# Altium PCB ESP32-S3-PCB.PcbDoc
Units mm, origin at the board's own origin, x right, y up, seen from the top; angles counter-clockwise.
Board outline 32.71 x 66 mm, 4 copper layers (Top Layer, Power, Ground, Bottom Layer), stack 0.603 mm thick; 45 components, 55 nets, 231 pads, 89 vias.
Unrouted connection lines stored in the file: 7.
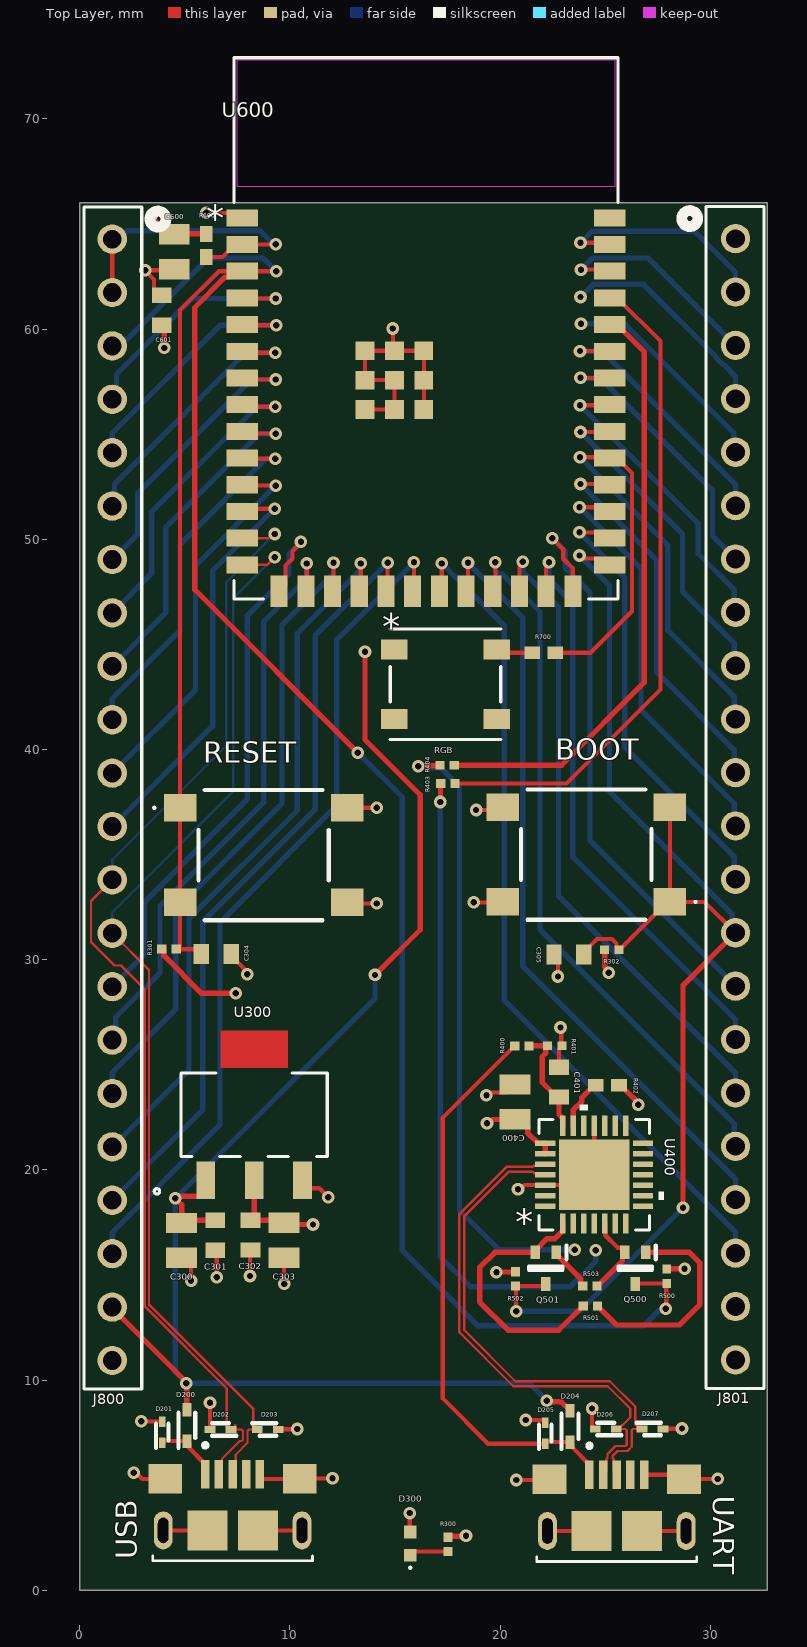
[diagram p0: Top Layer view]
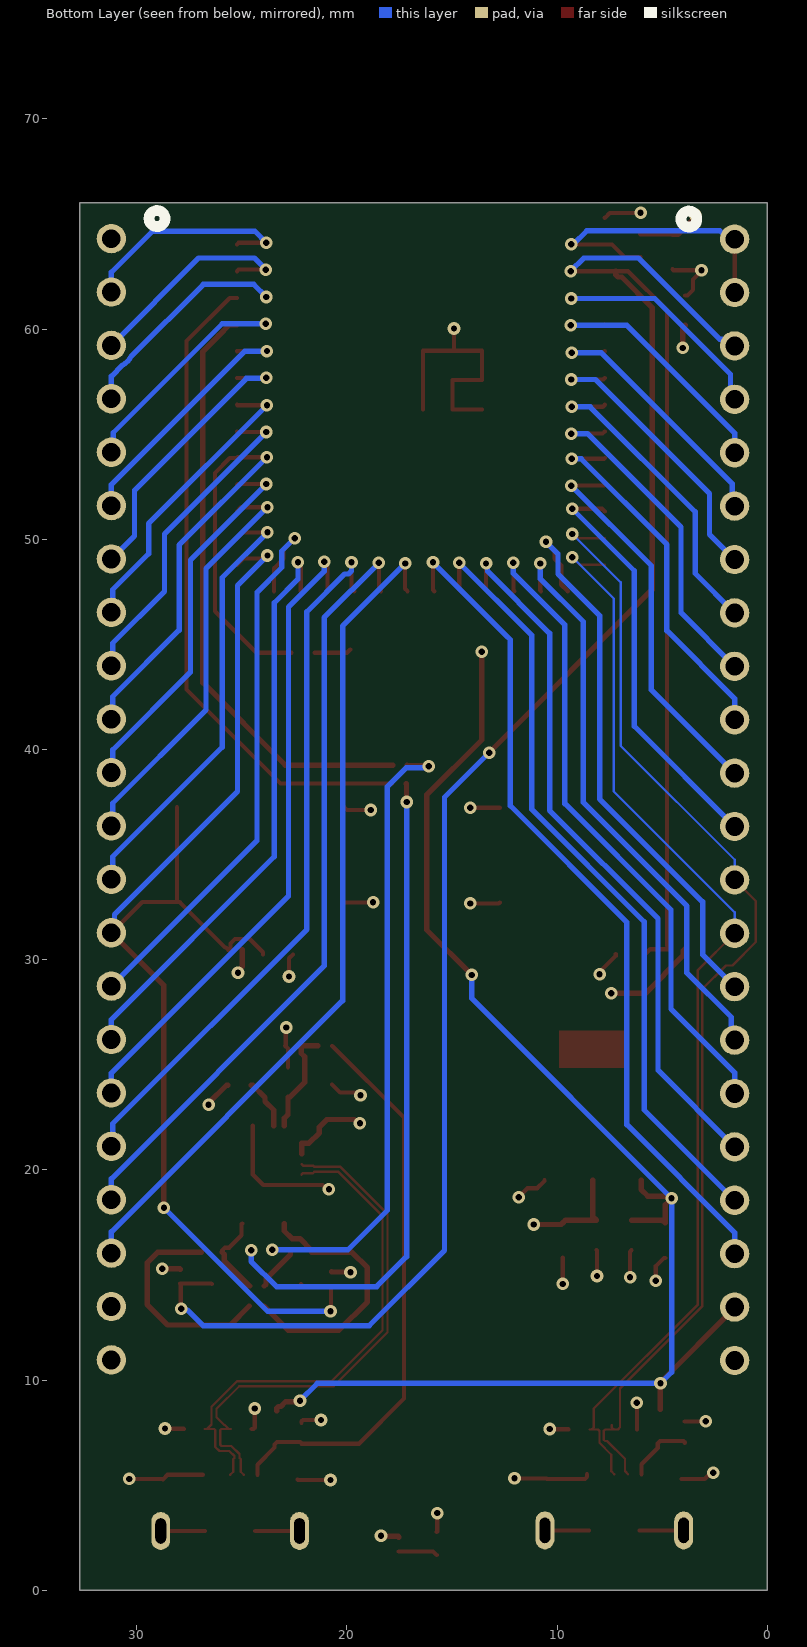
[diagram p1: Bottom Layer view, seen from below]
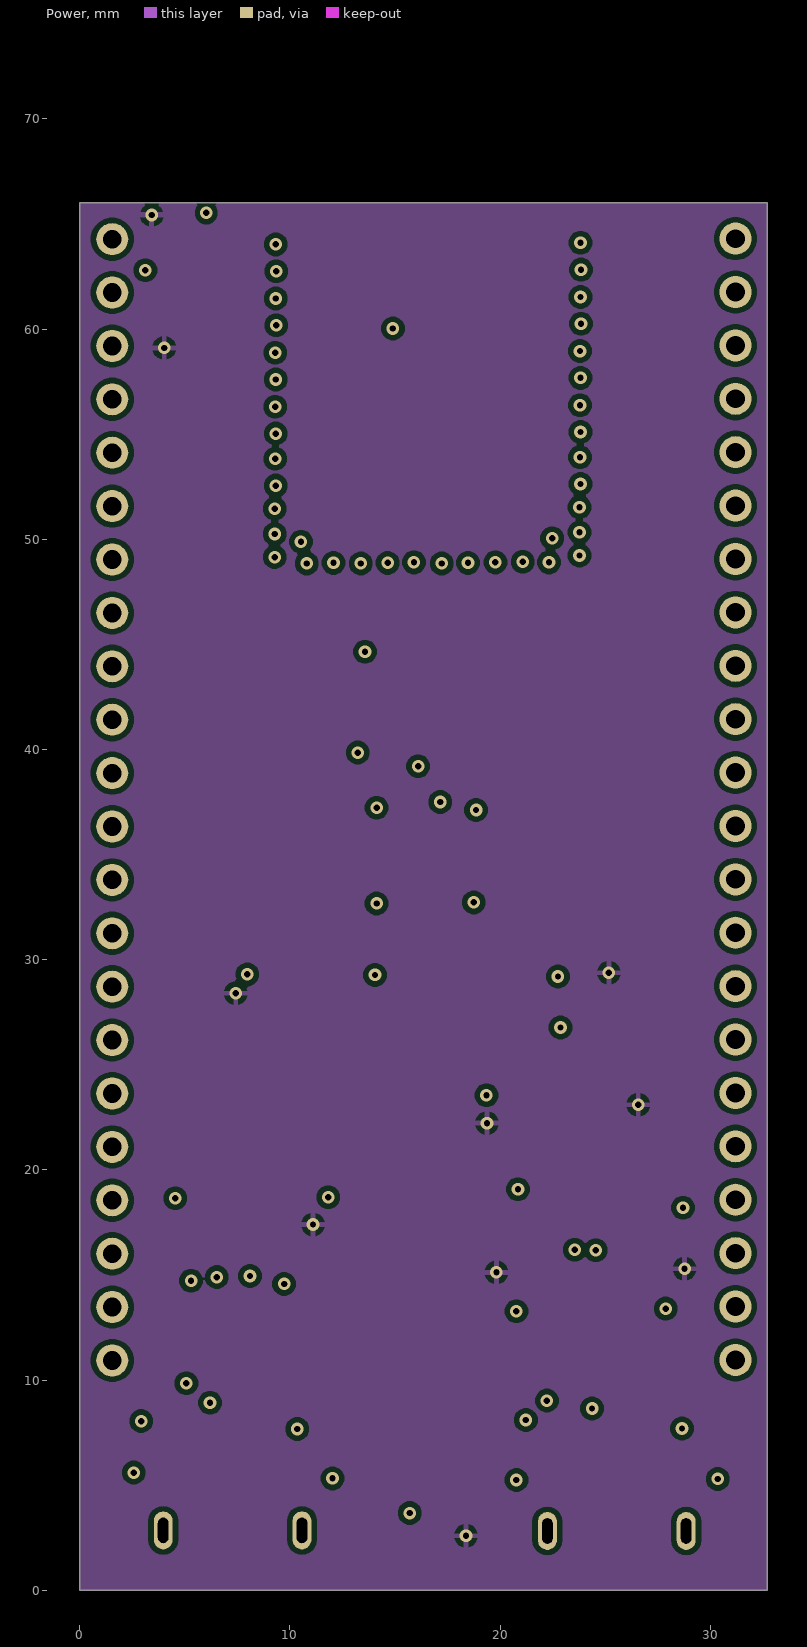
[diagram p2: Power]
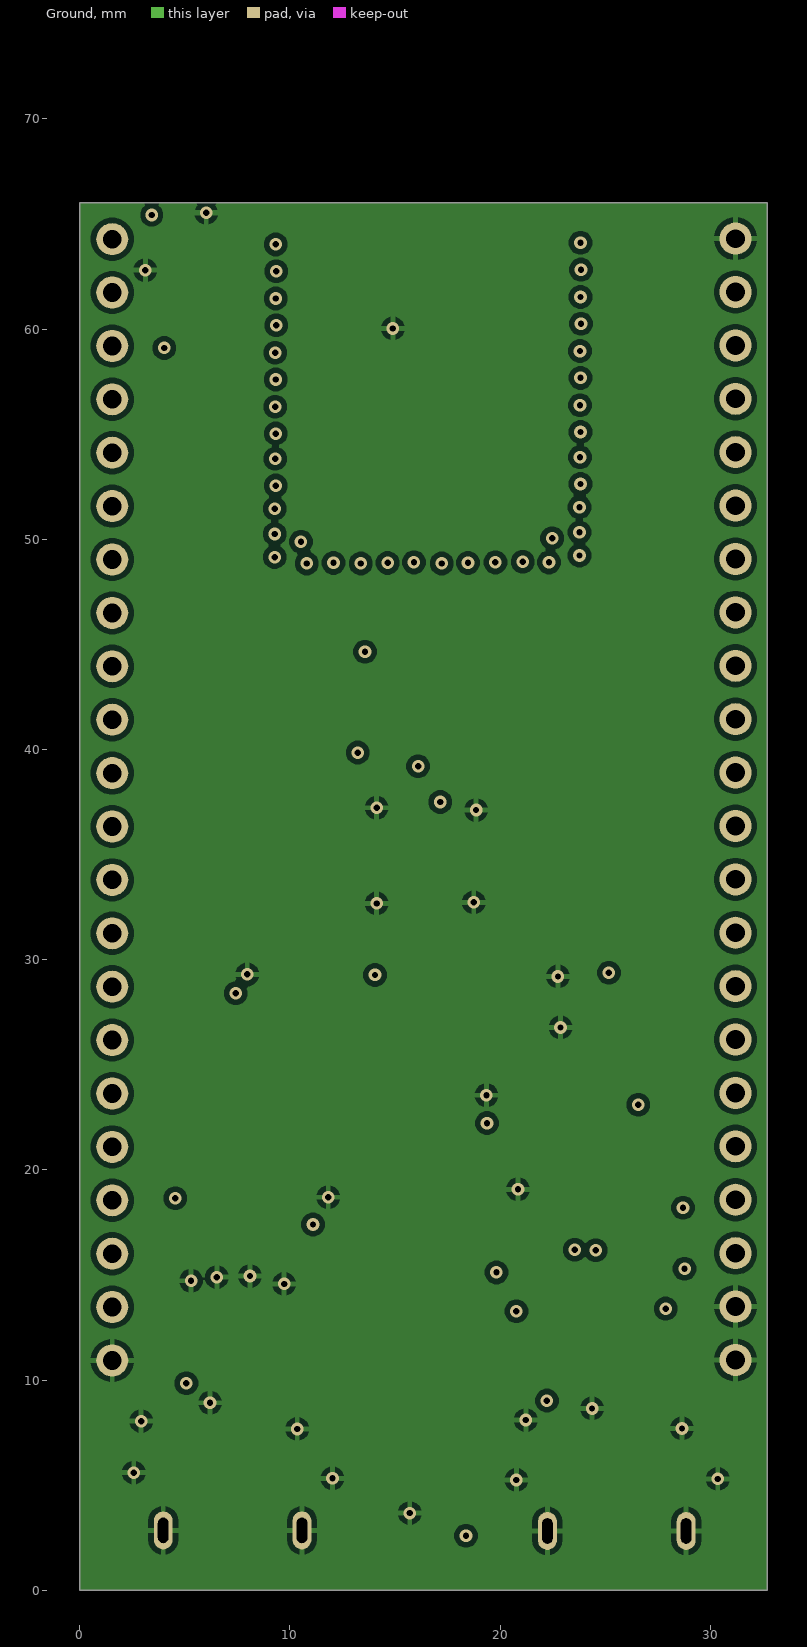
[diagram p3: Ground]
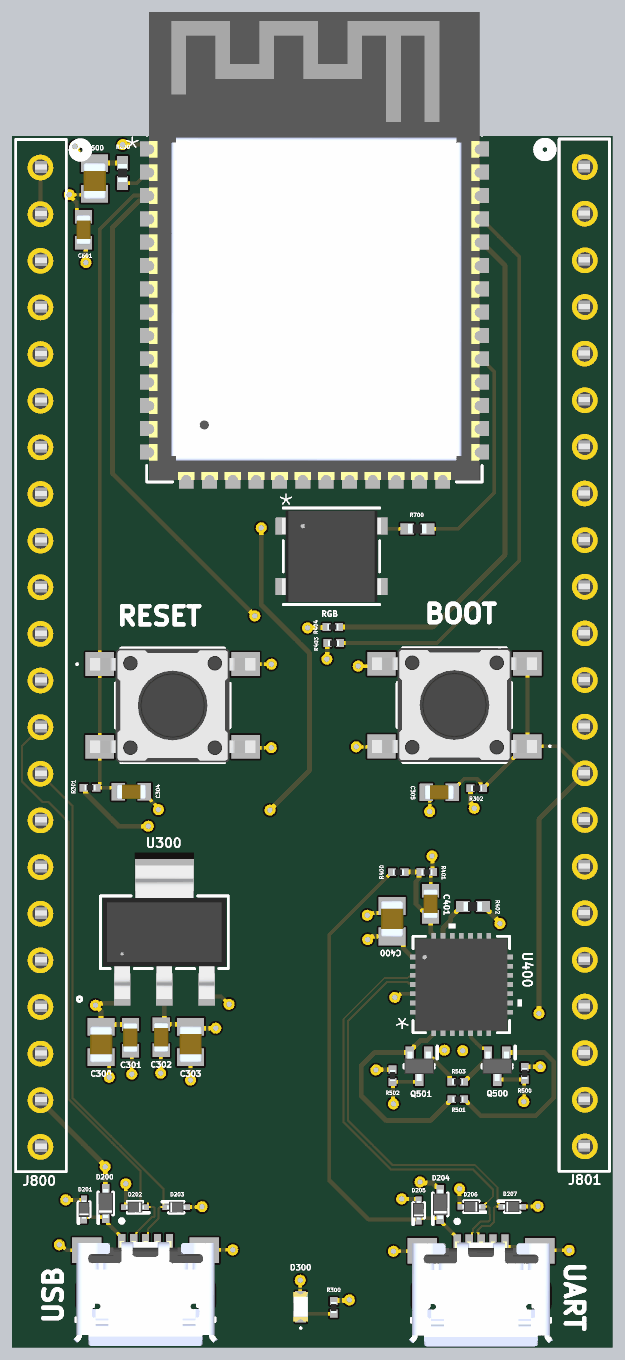
[diagram p4: 3D render of the assembled board from above, using the file's embedded part models]

## Layer stack, top to bottom
Top Solder: solder mask 0.0102, Solder Resist, Dk 3.5
Top Layer: signal copper 0.0356
Dielectric 2: prepreg 0.0711, PP-006, Dk 4.1
Power: signal copper 0.035
Dielectric 1: dielectric 0.32, FR-4, Dk 4.8
Ground: signal copper 0.035
Dielectric 3: prepreg 0.0711, PP-006, Dk 4.1
Bottom Layer: signal copper 0.0356
Bottom Solder: solder mask 0.0102, Solder Resist, Dk 3.5

## Board outline
0,0 0,66 32.707,66 32.707,0

## Design rules (kind name [scope] priority, off if disabled: settings)
Clearance [All] p1: gap=0.254 ignorepadtopadclearanceinfootprint=FALSE except(0.1: Arc-Arc Arc-Track Track-Track SMDPad-SMDPad; 0.2: Arc-SMDPad Track-SMDPad)
DiffPairsRouting USB_UART [InDifferentialPairClass('USB_UART_DIFF')] p1: maxlimit=0.127 minlimit=0.127 mostfreqgap=0.127 toplayer_minwidth=0.11 toplayer_maxwidth=0.11 toplayer_prefwidth=0.11 midlayer1_minwidth=0.057 midlayer1_maxwidth=0.057 midlayer1_prefwidth=0.057 midlayer2_minwidth=0.057 midlayer2_maxwidth=0.057 midlayer2_prefwidth=0.057 bottomlayer_minwidth=0.11 bottomlayer_maxwidth=0.11 bottomlayer_prefwidth=0.11 impedanceprofiledriven=TRUE impedanceprofileid={631D760A-93E1-46DE-AC06-2FC455241921} impedanceprofilevalue=90.000000 maxuncoupledlength=12.7
PolygonConnect [All] p1: connectstyle=Relief reliefconductorwidth=0.254 reliefentries=4 polygonreliefangle="90 Angle" airgapwidth=0.254
RoutingVias [All] p1: holewidth=0.711 width=1.27 viastyle="Through Hole" minholewidth=0.711 minwidth=1.27 maxholewidth=0.711 maxwidth=1.27
SolderMaskExpansion [All] p1: expansion=0.102 istentingtop=FALSE
SupplyNets "Schematic Supply Nets_5" [InNet('ESP_3V3')] p1: voltage=0.000
SupplyNets "Schematic Supply Nets_4" [InNet('VBBUS')] p2: voltage=0.000
SupplyNets "Schematic Supply Nets_3" [InNet('GND')] p3: voltage=0.000
SupplyNets "Schematic Supply Nets_2" [InNet('VCC_3V3')] p4: voltage=0.000
SupplyNets "Schematic Supply Nets_1" [InNet('VCC_5V')] p5: voltage=0.000
SupplyNets "Schematic Supply Nets" [InNet('VBUS')] p6: voltage=0.000
Width VCC_5V [InNet('VCC_5V')] p1: maxlimit=0.254 minlimit=0.254 preferedwidth=0.254
Width [All] p2: maxlimit=0.254 minlimit=0.2 preferedwidth=0.254 midlayer1_minwidth=0.254 midlayer2_minwidth=0.254 bottomlayer_minwidth=0.254 minimp=50.000000 maximp=50.000000 favimp=50.000000
29 further rules are at their usual default settings.

## Classes and differential pairs
differential pair class USB_UART_DIFF: USB_UART
component class USB: D200 D201 D202 D203 D204 D205 D206 D207 UART USB
component class USB_TO_UART_CONVERTER: C400 C401 R400 R401 R402 U400
component class RGB_LED: R700 RGB
component class POWER: BOOT C300 C301 C302 C303 C304 C305 D300 R300 R301 R302 RESET U300
component class PIN-HEADERS: J800 J801
component class ESP32-S3-WROOM-1U: C600 C601 R600 U600
component class AUTO_PROGRAMMING: Q500 Q501 R500 R501 R502 R503
differential pair USB: +GPIO20 -GPIO19
differential pair USB_UART: +USB_UART_P -USB_UART_N

## Components (designator, comment, footprint, x,y, rotation, side; value= is the part's Value field where it differs from the comment)
BOOT "222AMVBAR" 222AMVBAR 24.1,35 r180 top
C300 "10 µF ±10% 25V" CAPC2012X145N 4.85,16.645 r90 top value="10 µF"
C301 "0.1 µF ±10% 50V" CAPC1608X90N 6.45,16.89 r90 top value="0 .1 µF"
C302 "0.1 µF ±10% 50V" CAPC1608X90N 8.125,16.9 r90 top value="0 .1 µF"
C303 "10 µF ±10% 25V" CAPC2012X145N 9.725,16.65 r90 top value="10 µF"
C304 "0.1 µF ±10% 50V" CAPC1608X90N 6.5,30.275 r180 top value="0 .1 µF"
C305 "0.1 µF ±10% 50V" CAPC1608X90N 23.275,30.25 r0 top value="0 .1 µF"
C400 "10 µF ±10% 25V" CAPC2012X145N 20.7,23.23 r270 top value="10 µF"
C401 "1 µF ±10% 10V" CAPC1608X90N 22.8,24.175 r270 top value="1 µF"
C600 "10 µF ±10% 25V" CAPC2012X145N 4.5,63.675 r90 top value="10 µF"
C601 "0.1 µF ±10% 50V" CAPC1608X90N 3.9,60.89 r270 top value="0 .1 µF"
D200 "370 mV @ 1 mA" SODFL1608X70N 5.1,7.85 r90 top
D201 "12.5V Clamp" SODFL1006X40N 3.925,7.525 r90 top
D202 "12.5V Clamp" SODFL1006X40N 6.7,7.65 r180 top
D203 "12.5V Clamp" SODFL1006X40N 8.95,7.65 r0 top
D204 "370 mV @ 1 mA" SODFL1608X70N 23.325,7.8 r90 top
D205 "12.5V Clamp" SODFL1006X40N 22.15,7.475 r90 top
D206 "12.5V Clamp" SODFL1006X40N 25.025,7.675 r180 top
D207 "12.5V Clamp" SODFL1006X40N 27.25,7.675 r0 top
D300 "LED RED" 5988A10107F 15.725,2.225 r90 top
J800 "CONN HEADER VERT 22POS" CON22_1X22_TU_TSW 1.55,37.605 r270 top locked
J801 "CONN HEADER VERT 22POS" CON22_1X22_TU_TSW 31.2,37.63 r270 top locked
Q500 "NSS20101JT1G" SOTFL50P160X80-3N 26.425,15.325 r270 top
Q501 "NSS20101JT1G" SOTFL50P160X80-3N 22.175,15.325 r270 top
R300 "3.4K OHM 1%" RESC0603X26N 17.525,2.19 r270 top value="3.4 kOhms"
R301 "10K OHM 1%" RESC0603X26N 4.25,30.5 r180 top value="10 kOhms"
R302 "10K OHM 1%" RESC0603X26N 25.31,30.475 r180 top value="10 kOhms"
R400 "22.1K OHM 1%" RESC0603X26N 21.04,25.9 r0 top value="22.1 kOhms"
R401 "47.5K OHM 1%" RESC0603X26N 22.6,25.905 r180 top value="47.5 kOhms"
R402 "1K Ohm 5%" RESC1005X40N 25.1,24.025 r0 top value="1K OHM"
R403 "0 OHM 1%" RESC0603X26N 17.515,38.375 r0 top value="10 kOhms"
R404 "0 OHM 1%" RESC0603X26N 17.475,39.25 r0 top value="10 kOhms"
R500 "10K OHM 1%" RESC0603X26N 27.925,14.94 r90 top value="10 kOhms"
R501 "10K OHM 1%" RESC0603X26N 24.29,13.525 r0 top value="10 kOhms"
R502 "10K OHM 1%" RESC0603X26N 20.725,14.815 r90 top value="10 kOhms"
R503 "10K OHM 1%" RESC0603X26N 24.275,14.475 r180 top value="10 kOhms"
R600 "1K Ohm 5%" RESC1005X40N 6.025,63.975 r270 top value="1K OHM"
R700 "1K Ohm 5%" RESC1005X40N 22.075,44.6 r180 top value="1K OHM"
RESET "222AMVBAR" 222AMVBAR 8.75,34.975 r0 top locked
RGB "ADDRESS RGB LED" COM-16347_SPK 17.4,43.1 r0 top (schematic designator LED700)
U300 "IC REG LINEAR 3.3V 1A" KC_3_ADI 8.3,22.625 r0 top
U400 "IC USB TO UART BRIDGE" QFN28_5X5_SIL 24.475,19.775 r0 top
U600 "ESP32-S3-WROOM-1-N8" ESP32-S3-WROOM-1_EXP 16.475,60.03 r0 top locked
UART "MICRO USB B" AMPHENOL_10118193-0001LF 25.55,2.825 r0 top locked
USB "MICRO USB B" AMPHENOL_10118193-0001LF 7.275,2.85 r0 top

## Footprints (in the part's own frame and the unit in brackets; to place one, negate y for a bottom-side part, rotate by r counter-clockwise, add the part's x,y. Pads: shape width x height; smd on the part's side, far side on the other; paste and mask are expansions set on the pad)
222AMVBAR [mm]
  rect 1.55x1.3 smd: 1(-3.975,2.25) 2(-3.975,-2.25) 3(3.975,2.25) 4(3.975,-2.25)
  silkscreen extent -5.25,-3.1 3.1,3.1, body extent -4.5,-3.1 4.5,3.1, height 5
5988A10107F [mm]
  rect 0.6x0.6 smd: 1(-0.55,0) 2(0.55,0)
  silkscreen extent -1.2,-0.05 -1.1,0.05, body extent -0.8,-0.4 0.8,0.4, height 0.7
AMPHENOL_10118193-0001LF [mm]
  rect 0.4x1.35 smd: 1(-1.3,2.675) 2(-0.65,2.675) 3(0,2.675) 4(0.65,2.675) 5(1.3,2.675)
  rect 1.6x1.4 smd: S1(-3.2,2.45) S2(3.2,2.45)
  rect 1.9x1.9 smd: S3(1.2,0) S4(-1.2,0)
  oval 0.9x1.8 hole 0.5 slot 1.2 at 90 deg: S5(-3.3,0) S6(3.3,0)
  silkscreen extent -3.8,-1.45 3.8,4.15, body extent -3.93,-2.76 3.93,2.95, height 2.85
CAPC1608X90N [mm]
  rect 0.73x0.94 smd: 1(-0.71,0) 2(0.71,0)
  body extent -0.8,-0.4 0.8,0.4, height 0.9
CAPC2012X145N [mm]
  rect 0.97x1.47 smd: 1(-0.83,0) 2(0.83,0)
  body extent -1.13,-0.63 0.87,0.63, height 1.45
COM-16347_SPK [mil]
  rect 49x37 smd paste+0 mask+0: 1(-96,64.96) 2(-96,-64.96) 3(96,-64.96) 4(96,64.96)
  silkscreen extent -104,-104 104,104, body extent -106,-99 106,99, height 63
CON22_1X22_TU_TSW [mil]
  round 55 / inner round 60 / far side round 55 hole 35 paste-99999 mask+0: 1(-1050,0) 2(-950,0) 3(-850,0) 4(-750,0) 5(-650,0) 6(-550,0) 7(-450,0) 8(-350,0) 9(-250,0) 10(-150,0) 11(-50,0) 12(50,0) 13(150,0) 14(250,0) 15(350,0) 16(450,0) 17(550,0) 18(650,0) 19(750,0) 20(850,0) 21(950,0) 22(1050,0)
  silkscreen extent -1110,-53 1103,101, body extent -1106,-49 1099,51, height 82
ESP32-S3-WROOM-1_EXP [mil]
  rect 59x32 smd paste+0 mask+0: 1(-344.49,207.09) 2(-344.49,157.09) 3(-344.49,107.09) 4(-344.49,57.09) 5(-344.49,7.09) 6(-344.49,-42.91) 7(-344.49,-92.91) 8(-344.49,-142.91) 9(-344.49,-192.91) 10(-344.49,-242.91) 11(-344.49,-292.91) 12(-344.49,-342.91) 13(-344.49,-392.91) 14(-344.49,-442.91) 27(344.49,-442.91) 28(344.49,-392.91) 29(344.49,-342.91) 30(344.49,-292.91) 31(344.49,-242.91) 32(344.49,-192.91) 33(344.49,-142.91) 34(344.49,-92.91) 35(344.49,-42.91) 36(344.49,7.09) 37(344.49,57.09) 38(344.49,107.09) 39(344.49,157.09) 40(344.49,207.09)
  rect 32x59 smd paste+0 mask+0: 15(-275,-492.13) 16(-225,-492.13) 17(-175,-492.13) 18(-125,-492.13) 19(-75,-492.13) 20(-25,-492.13) 21(25,-492.13) 22(75,-492.13) 23(125,-492.13) 24(175,-492.13) 25(225,-492.13) 26(275,-492.13)
  rect 35x35 smd paste+0 mask+0: 41(-59.06,-96.85) 42(-114.17,-41.73) 43(-114.17,-96.85) 44(-114.17,-151.97) 45(-59.06,-151.97) 46(-3.94,-151.97) 47(-3.94,-96.85) 48(-3.94,-41.73) 49(-59.06,-41.73)
  Top Layer keep-out region: 354.5,502 -354.5,502 -354.5,266 354.5,266
  silkscreen extent -360,-507 360,507, body extent -354,-503 354,501, height 128
KC_3_ADI [mil]
  rect 35x69.5 smd paste+0 mask+0: 1(-90.55,-122.75) 2(0,-122.75) 3(90.55,-122.75)
  Top Layer region: 63,88 63,157.5 -63,157.5 -63,88
  silkscreen extent -187,-148 137,78, body extent -132,-144 132,144, height 67
QFN28_5X5_SIL [mil]
  rect 38x10 smd paste+0 mask+0: 1(-91.5,-59.06) 2(-91.5,-39.37) 3(-91.5,-19.68) 4(-91.5,0) 5(-91.5,19.68) 6(-91.5,39.37) 7(-91.5,59.06) 15(91.5,59.06) 16(91.5,39.37) 17(91.5,19.68) 18(91.5,0) 19(91.5,-19.68) 20(91.5,-39.37) 21(91.5,-59.06)
  rect 10x38 smd paste+0 mask+0: 8(-59.06,91.5) 9(-39.37,91.5) 10(-19.68,91.5) 11(0,91.5) 12(19.69,91.5) 13(39.37,91.5) 14(59.06,91.5) 22(59.06,-91.5) 23(39.37,-91.5) 24(19.69,-91.5) 25(0,-91.5) 26(-19.68,-91.5) 27(-39.37,-91.5) 28(-59.06,-91.5)
  rect 132x132 smd paste-66 mask+0: 29(0,0)
  silkscreen extent -104,-104 130,130, body extent -99,-99 99,99, height 32
RESC0603X26N [mm]
  rect 0.44x0.42 smd: 1(-0.34,0) 2(0.34,0)
  body extent -0.3,-0.15 0.3,0.15, height 0.26
RESC1005X40N [mm]
  rect 0.75x0.6 smd: 1(-0.55,0) 2(0.55,0)
  body extent -0.5,-0.25 0.5,0.25, height 0.4
SODFL1006X40N [mm]
  rect 0.51x0.32 smd: 1(-0.5,0) 2(0.5,0)
  silkscreen extent -0.75,-0.3 0.4,0.3, body extent -0.5,-0.3 0.5,0.3, height 0.4
SODFL1608X70N [mm]
  rect 0.64x0.42 smd: 1(-0.75,0) 2(0.75,0)
  silkscreen extent -1.07,-0.4 0.6,0.4, body extent -0.8,-0.4 0.8,0.4, height 0.7
SOTFL50P160X80-3N [mm]
  rect 0.65x0.46 smd: B(-0.75,0.5) C(0.75,0) E(-0.75,-0.5)
  silkscreen extent -1.07,-0.8 0.08,0.98, body extent -0.8,-0.8 0.8,0.8, height 0.8

## Part data
BOOT RESET: "Tactile Switches Gull Wing AF 160gf Act. Dir. Vertical", Manufacturer_Name=CTS, Mouser Part Number=774-222AMVBAR, Arrow Part Number=222AMVBAR, Arrow Price/Stock=https://www.arrow.com/en/products/222amvbar/cts, Datasheet Link=https://www.ctscorp.com/wp-content/uploads/222A.pdf, Geometry.Height=5.2mm, Manufacturer_Part_Number=222AMVBAR, Mouser Price/Stock=https://www.mouser.co.uk/ProductDetail/CTS-Electronic-Components/222AMVBAR?qs=%252BiOMRfgENTH99oc01%252BgePw%3D%3D
C300 C303 C400 C600: library part CL21A106KAYNNNE, "10 µF ±10% 25V Ceramic Capacitor X5R 0805 (2012 Metric)", Tolerance=±10%, Voltage - Rated=25V
C301 C302 C304 C305 C601: library part CL10B104KB8NNNC, "0.1 µF ±10% 50V Ceramic Capacitor X7R 0603 (1608 Metric)", Tolerance=±10%, Voltage - Rated="50 V"
C401: library part CL10B105KP8NNNC, "1 µF ±10% 10V Ceramic Capacitor X7R 0603 (1608 Metric)", Tolerance=±10%, Voltage - Rated="10 V"
D200 D204: library part RB751S40T1G, "Diode 30 V 30mA Surface Mount SOD-523", Current - Reverse Leakage @ Vr="500 nA @ 30 V", Voltage - DC Reverse (Vr) (Max)="30 V", Voltage - Forward (Vf) (Max) @ If="370 mV @ 1 mA"
D201 D202 D203 D205 D206 D207: library part SZESD9B5.0ST5G, "12.5V Clamp 15A (8/20µs) Ipp Tvs Diode Surface Mount SOD-923", Voltage - Breakdown (Min)=5.8V, Voltage - Clamping (Max) @ Ipp=12.5V, Voltage - Reverse Standoff (Typ)="5V (Max)"
D300: library part 5988A10107F, "598 A SMD LED 0402 pkg Red 635nm Low Current 5ma 7\" Reel", Current - Forward (mA)=20, Reverse Voltage (V)=5, Voltage - Forward (Vf) (Typ)=1.6V
J800 J801: library part TSW-122-08-T-S, "Connector Header Through Hole 22 position 0.100\" (2.54mm)", Mfr_Name="Samtec Inc", RefDes=RefDes, Type=Type
Q500 Q501: "Bipolar Transistors - BJT 20V NPN LOW VCE(SAT)", Collector Current − Continuous=1.0, Collector-Base Voltage=40, Collector-Emitter Voltage=20, Emitter-Base Voltage=6.0
R300: library part RC0603FR-073K4L, "3.4 kOhms ±1% 0.1W, 1/10W Chip Resistor 0603 (1608 Metric) Moisture Resistant Thick Film", Power (Watts)="0.1W, 1/10W", Tolerance=±1%
R301 R302 R403 R404 R500 R501 R502 R503: library part RC0402JR-0710KL, "10 kOhms ±5% 0.063W, 1/16W Chip Resistor 0402 (1005 Metric) Moisture Resistant Thick Film", Power (Watts)=1/16W, Tolerance=±5%
R400: library part RC0805FR-0722K1L, "22.1 kOhms ±1% 0.125W, 1/8W Chip Resistor 0805 (2012 Metric) Moisture Resistant Thick Film", Power (Watts)="0.125W, 1/8W", Tolerance=±1%
R401: library part RC0603FR-0747K5L, "47.5 kOhms ±1% 0.1W, 1/10W Chip Resistor 0603 (1608 Metric) Moisture Resistant Thick Film", Power (Watts)="0.1W, 1/10W", Tolerance=±1%
R402 R600 R700: library part RC0402JR071KL, "Res Thick Film 0402 1K Ohm 5% 0.063W(1/16W) +/-100ppm/C Epoxy SMD T/R", Tolerance=±5%
RGB: library part COM-16347, "Addressable Lighting - LED Serial NRZ (Shift Register) Red, Green, Blue (RGB) 5.00mm L x 5.00mm W", Blue Voltage(V)=3.0-3.4, Power supply voltage=+3.5~+5.3, Red Voltage(V)=2.0-2.2, Green Voltage(V)=3.0-3.4, Type="LED Addressable"
U300: library part ADP3338AKCZ-3.3RL7, "Linear Voltage Regulator IC Positive Fixed 1 Output 1A SOT-223-3", Current - Output=1A, Voltage - Input (Max)=8V, Voltage - Output (Min/Fixed)=3.3V, Voltage Dropout (Max)="0.4V @ 1A"
U400: library part CP2102N-A02-GQFN28, "USB Bridge, USB to UART USB 2.0 UART Interface 28-QFN (5x5)", Current - Supply=9.5mA, Voltage - Supply="3V ~ 3.6V", Function="Bridge, USB to UART", Protocol=USB, Standards="USB 2.0"
U600: "WiFi 802.11a/b/g/n, Bluetooth v5.0 Transceiver Module 2.4GHz PCB Trace", Frequency=2.4GHz, Mfr="Espressif Systems", Category="RF Transceiver Modules and Modems", Memory Size="8MB Flash", Serial Interfaces="ADC, GPIO, I2C, I2S, SPI, PWM, UART, USB"
UART USB: library part 10118193-0001LF, "Right Angle Surface Mount Mount Female USB Connector 100 V ac 1.8A", Package=None, Check_prices=https://www.snapeda.com/parts/10118193-0001LF/Amphenol+FCI/view-part/?ref=eda, MF="Amphenol ICC", MP=10118193-0001LF, SnapEDA_Link=https://www.snapeda.com/parts/10118193-0001LF/Amphenol+FCI/view-part/?ref=snap, Specifications="USB 2.0"

## Via types
v1: diameter 0.6, hole 0.3, Top Layer to Bottom Layer, 89 vias

## Nets (pads, with @x,y where several pads share a name; then routed paths per layer and width w, separated by ;. In a path a pad name is that pad's centre, name@x,y a point inside that pad or via, vN(x,y) a via of type N, cw(c..) or ccw(c..) an arc to the next point about the centre after c; other vN are vias at no path point)
DTR: Q501.E R501.1 U400.28 | length 12.7
  Top Layer w0.254: U400.28 22.975,17.095 22.607,16.727 22.232,16.727 21.675,16.17 Q501.E 19.75,16.075 19.025,15.35 19.025,13.725 20.375,12.375 22.79,12.375 23.94,13.525 R501.1
EN: C304.2 J800.3 Q500.C R301.1 R500.1 RESET.1 RESET.2 U600.3 | length 115.5
  Top Layer w0.2: R301.1 R301.1@4.6,30.5 ; C304.2 5.565,30.5 R301.1@4.6,30.5 ; v1(9.35,62.75) U600.3 7.2,62.75 6.625,62.75 4.775,60.9 RESET.1 RESET.2 4.775,30.675 R301.1@4.6,30.5 ; Q500.C 26.45,14.6 R500.1 27.9,14.575 27.9,13.425 v1(27.875,13.4)
  Top Layer w0.254: U600.3@7.2,62.75 7.2,62.568 7.103,62.471 6.921,62.471 5.475,61.025 5.475,47.6 v1(13.225,39.85)
  Bottom Layer w0.254: J800.3 1.859,59.195 2.171,59.507 2.257,59.507 6.125,63.375 8.725,63.375 v1(9.35,62.75) ; v1(13.225,39.85) 15.35,37.725 15.35,16.175 18.931,12.594 26.844,12.594 27.584,13.334 27.809,13.334 v1(27.875,13.4)
ESP_3V3: J800.1 J800.2 R600.2 U600.2 | length 14.3
  Top Layer w0.2: J800.2 J800.1 ; R600.2 6.787,63.425 7.382,64.02 U600.2 7.73,64.025 v1(9.325,64.025)
  Bottom Layer w0.254: J800.1 1.859,64.275 2.259,64.675 8.581,64.675 9.231,64.025 v1(9.325,64.025)
GND: BOOT.3 BOOT.4 C300.1 C301.1 C302.1 C303.1 C304.1 C305.1 C400.1 C401.1 C600.1 C601.1 D201.2 D202.2 D203.2 D205.2 D206.2 D207.2 D300.2 J800.22 J801.1 J801.21 J801.22 R401.1 RESET.3 RESET.4 RGB.3 U300.3 U400.3 U400.11 U400.29 U600.1 U600.40 U600.41 U600.42 U600.43 U600.44 U600.45 U600.46 U600.47 U600.48 U600.49 UART.5 UART.S1 UART.S2 UART.S3 UART.S4 UART.S5 UART.S6 USB.5 USB.S1 USB.S2 USB.S3 USB.S4 USB.S5 USB.S6 | length 67.5
  Top Layer w0.2: v1(2.575,5.6) 2.675,5.6 2.975,5.3 USB.S1 ; v1(2.925,8.05) 2.937,8.037 3.912,8.037 D201.2 ; C601.1 3.795,61.6 3.53,61.865 3.53,62.356 3.125,62.761 v1(3.125,62.8) 4.455,62.8 C600.1 ; USB.S5 USB.S4 ; C300.1 4.915,15.815 5.3,15.43 v1(5.3,14.725) ; v1(6.025,65.525) 7.49,65.525 U600.1 ; D202.2 v1(6.2,8.925) ; C301.1 6.525,16.105 v1(6.525,14.9) ; C304.1 7.21,30.17 7.975,29.405 v1(7.975,29.3) ; v1(8.1,14.95) 8.1,16.165 C302.1 ; USB.S3 USB.S6 ; USB.5 8.575,5.4 8.675,5.3 USB.S2 10.5,5.325 v1(12.025,5.325) ; D203.2 9.462,7.662 10.338,7.662 v1(10.35,7.675) ; v1(9.725,14.575) C303.1 ; U300.3 10.6,19.469 10.945,19.124 11.401,19.124 v1(11.825,18.7) ; RESET.4 12.775,32.675 v1(14.125,32.675) ; RESET.3 v1(14.125,37.225) ; U600.44 U600.45 U600.41 U600.43 U600.42 U600.49 ; v1(14.9,60.025) 14.9,59.045 U600.49 ; v1(15.7,3.675) 15.7,2.8 D300.2 ; U600.46 U600.47 U600.48 U600.49 ; v1(18.75,32.725) 20.1,32.725 BOOT.3 ; v1(18.857,37.118) 19.993,37.118 BOOT.4 ; v1(19.35,23.55) 19.458,23.55 19.583,23.675 20.315,23.675 C400.1 ; v1(20.775,5.25) 22.325,5.25 UART.S1 ; v1(20.85,19.075) 20.958,19.075 21.158,19.275 U400.3 23.975,19.275 U400.29 U400.11 ; v1(21.225,8.1) 22.09,8.1 22.15,8.04 D205.2 ; UART.S5 UART.S4 ; C305.1 22.75,30.065 v1(22.75,29.2) ; C401.1 22.8,25.775 22.93,25.905 R401.1 22.908,25.937 22.908,26.743 v1(22.875,26.775) ; v1(24.375,8.65) 24.375,7.735 24.435,7.675 D206.2 ; UART.S3 UART.S6 ; UART.5 28.525,5.5 UART.S2 28.775,5.3 v1(30.35,5.3) ; D207.2 27.762,7.688 28.638,7.688 v1(28.65,7.7)
GPIO0: BOOT.1 BOOT.2 C305.2 J801.14 Q501.C R302.1 R502.1 U600.27 | length 63.4
  Top Layer w0.2: v1(20.775,13.275) 20.75,13.3 20.75,14.45 R502.1 22.075,14.475 Q501.C ; v1(23.775,49.225) 23.883,49.225 24.022,49.086 24.919,49.086 U600.27 ; C305.2 23.985,30.355 24.615,30.985 25.314,30.985 25.53,30.769 25.53,30.585 25.64,30.475 R302.1 25.76,30.585 25.785,30.585 27.95,32.75 BOOT.1 ; BOOT.2 BOOT.1 ; J801.14 29.73,32.75 BOOT.1
  Top Layer w0.254: v1(28.7,18.2) 28.7,28.78 J801.14
  Bottom Layer w0.254: v1(20.775,13.275) 23.775,13.275 v1(28.7,18.2) ; v1(23.775,49.225) 25.2,47.8 25.2,38 31.051,32.149 31.051,31.429 J801.14
GPIO1: J801.2 U600.39 | length 10.8
  Top Layer w0.2: v1(23.825,64.1) 25.145,64.1 U600.39
  Bottom Layer w0.254: v1(23.825,64.1) 24.375,64.65 29.25,64.65 31.2,62.7 J801.2
GPIO2: J801.3 U600.38 | length 10.7
  Top Layer w0.2: v1(23.85,62.825) 25.15,62.825 U600.38
  Bottom Layer w0.254: v1(23.85,62.825) 24.4,63.375 27.045,63.375 J801.3
GPIO3: J800.15 U600.15 | length 27.7
  Top Layer w0.2: U600.15 9.796,47.836 9.796,48.747 10.122,49.073 10.122,49.429 10.525,49.832 v1(10.525,49.875)
  Bottom Layer w0.254: J800.15 3.075,30.24 3.075,32.75 7.975,37.65 7.975,46.375 9.956,48.356 9.956,49.306 v1(10.525,49.875)
GPIO4: J800.4 U600.4 | length 12
  Top Layer w0.2: U600.4 7.755,61.45 v1(9.325,61.45)
  Bottom Layer w0.254: J800.4 1.749,56.854 1.749,57.849 5.35,61.45 v1(9.325,61.45)
GPIO5: J800.5 U600.5 | length 12.5
  Top Layer w0.2: U600.5 7.76,60.175 v1(9.35,60.175)
  Bottom Layer w0.254: J800.5 1.55,55.05 6.675,60.175 v1(9.35,60.175)
GPIO6: J800.6 U600.6 | length 12.9
  Top Layer w0.2: U600.6 7.79,58.875 v1(9.3,58.875)
  Bottom Layer w0.254: J800.6 1.659,51.684 1.659,52.634 7.9,58.875 v1(9.3,58.875)
GPIO7: J800.7 U600.7 | length 14.1
  Top Layer w0.2: U600.7 7.795,57.6 v1(9.325,57.6)
  Bottom Layer w0.254: J800.7 2.75,50.235 2.75,52.175 8.175,57.6 v1(9.325,57.6)
GPIO8: J800.12 U600.12 | length 19.9
  Top Layer w0.2: U600.12 7.855,51.45 v1(9.275,51.45)
  Bottom Layer w0.254: J800.12 6.325,41.11 6.325,48.5 v1(9.275,51.45)
GPIO9: J800.17 U600.17 | length 31
  Top Layer w0.2: U600.17 12.075,47.575 v1(12.075,48.875)
  Bottom Layer w0.254: J800.17 1.55,24.625 4.575,27.65 4.575,32.375 9.625,37.425 9.625,45.925 12.075,48.375 v1(12.075,48.875)
GPIO10: J800.18 U600.18 | length 34
  Top Layer w0.2: U600.18 13.375,47.605 v1(13.375,48.85)
  Bottom Layer w0.254: J800.18 5.2,24.745 5.2,31.95 10.35,37.1 10.35,45.525 13.309,48.484 13.309,48.784 v1(13.375,48.85)
GPIO11: J800.19 U600.19 | length 37.1
  Top Layer w0.2: U600.19 14.65,47.61 v1(14.65,48.875)
  Bottom Layer w0.254: J800.19 5.85,22.855 5.85,31.8 11.2,37.15 11.2,45.425 v1(14.65,48.875)
GPIO12: J800.20 U600.20 | length 40.2
  Top Layer w0.2: U600.20 15.9,47.59 v1(15.9,48.9)
  Bottom Layer w0.254: J800.20 1.55,17.025 6.675,22.15 6.675,31.775 12.225,37.325 12.225,45.226 12.374,45.375 ; 12.375,45.375 v1(15.9,48.9)
GPIO13: J801.20 U600.21 | length 40
  Top Layer w0.2: U600.21 17.225,47.645 v1(17.225,48.85)
  Bottom Layer w0.254: v1(17.225,48.85) 20.2,45.875 20.2,28.05 31.2,17.05 J801.20
GPIO14: J801.19 U600.22 | length 37
  Top Layer w0.2: U600.22 18.475,47.625 v1(18.475,48.875)
  Bottom Layer w0.254: v1(18.475,48.875) 21.075,46.275 21.075,29.7 31.2,19.575 J801.19
GPIO15: J800.8 U600.8 | length 15.1
  Top Layer w0.2: U600.8 7.825,56.3 v1(9.3,56.3)
  Bottom Layer w0.254: J800.8 3.425,48.37 3.425,51.3 8.425,56.3 v1(9.3,56.3)
GPIO16: J800.9 U600.9 | length 16.4
  Top Layer w0.2: U600.9 7.83,55.025 v1(9.325,55.025)
  Bottom Layer w0.254: J800.9 4.1,46.505 4.1,50.575 8.55,55.025 v1(9.325,55.025)
GPIO17: J800.10 U600.10 | length 17.5
  Top Layer w0.2: U600.10 7.76,53.825 v1(9.3,53.825)
  Bottom Layer w0.254: J800.10 1.55,42.425 4.775,45.65 4.775,49.75 8.847,53.822 9.297,53.822 v1(9.3,53.825)
GPIO18: J800.11 U600.11 | length 18.5
  Top Layer w0.2: U600.11 7.765,52.55 v1(9.325,52.55)
  Bottom Layer w0.254: J800.11 5.512,42.837 5.512,48.737 v1(9.325,52.55)
GPIO19: D202.1 J800.13 U600.13 USB.2 | length 54.3
  Top Layer w0.11: J800.13 0.542,32.787 0.542,30.838 1.657,29.723 1.967,29.723 3.09,28.601 3.09,13.513 3.125,13.477 3.125,13.475 7,9.6 7,7.755 7.105,7.65 D202.1 D202.1@7.295,7.65 ; USB.2 6.77,5.67 6.77,6.256 7.617,7.103 7.707,7.103 7.772,7.168 7.772,7.585 7.707,7.65 D202.1@7.295,7.65 ; 7.4,7.85 7.4,7.755 D202.1@7.295,7.65 ; U600.13 8.943,50.05 9.143,50.25 v1(9.275,50.25)
  Bottom Layer w0.11: J800.13 1.55,34.75 6.975,40.175 6.975,47.95 v1(9.275,50.25)
GPIO20: D203.1 J800.14 U600.14 USB.3 | length 52.1
  Top Layer w0.11: J800.14 3.3,29.505 3.3,13.6 8.25,8.65 8.25,7.755 D203.1@8.355,7.65 ; USB.3 7.42,5.67 7.42,6.453 7.982,7.016 7.982,7.585 8.047,7.65 D203.1@8.355,7.65 ; U600.14 8.905,48.78 v1(9.275,49.15) ; D203.1 D203.1@8.355,7.65
  Bottom Layer w0.11: J800.14 1.55,32.25 7.3,38 7.3,47.175 v1(9.275,49.15)
GPIO21: J801.18 U600.23 | length 34
  Top Layer w0.2: U600.23 19.775,47.655 v1(19.775,48.9)
  Bottom Layer w0.254: v1(19.775,48.9) 19.775,48.499 19.924,48.35 20.1,48.35 21.9,46.55 21.9,31.433 31.134,22.2 31.134,21.186 J801.18
GPIO35: J801.13 U600.28 | length 21.1
  Top Layer w0.2: v1(23.775,50.325) 24.95,50.325 U600.28
  Bottom Layer w0.254: v1(23.775,50.325) 25.925,48.175 25.925,40.108 31.134,34.9 31.134,33.886 J801.13
GPIO36: J801.12 U600.29 | length 19.8
  Top Layer w0.2: v1(23.775,51.525) 25.02,51.525 U600.29
  Bottom Layer w0.254: v1(23.775,51.525) 26.7,48.6 26.7,41.873 31.134,37.44 31.134,36.426 J801.12
GPIO37: J801.11 U600.30 | length 18.2
  Top Layer w0.2: v1(23.825,52.625) 25.19,52.625 U600.30
  Bottom Layer w0.254: v1(23.825,52.625) 27.436,49.014 27.436,43.677 31.134,39.98 31.134,38.966 J801.11
GPIO38: J801.10 R700.1 U600.31 | length 29.4
  Top Layer w0.2: R700.1 24.3,44.6 26.274,46.574 26.274,53.154 25.568,53.86 U600.31 25.185,53.9 v1(23.8,53.9)
  Bottom Layer w0.254: v1(23.8,53.9) 27.975,49.725 27.975,45.678 31.134,42.52 31.134,41.506 J801.10
GPIO39: J801.9 U600.32 | length 15.6
  Top Layer w0.2: v1(23.825,55.1) 25.195,55.1 U600.32
  Bottom Layer w0.254: v1(23.825,55.1) 28.675,50.25 28.675,47.518 31.134,45.06 31.134,44.046 J801.9
GPIO40: J801.8 U600.33 | length 14.4
  Top Layer w0.2: v1(23.8,56.375) 25.2,56.375 U600.33
  Bottom Layer w0.254: v1(23.8,56.375) 29.425,50.75 29.425,49.308 31.134,47.6 31.134,46.586 J801.8
GPIO41: J801.7 U600.34 | length 13.6
  Top Layer w0.2: v1(23.825,57.675) 25.22,57.675 U600.34
  Bottom Layer w0.254: v1(23.825,57.675) 23.85,57.65 24.775,57.65 30.1,52.325 30.1,50.16 J801.7
GPIO42: J801.6 U600.35 | length 12.5
  Top Layer w0.2: v1(23.8,58.95) 25.215,58.95 U600.35
  Bottom Layer w0.254: v1(23.8,58.95) 24.85,58.95 31.2,52.6 J801.6
GPIO45: J801.15 U600.26 | length 27.9
  Top Layer w0.2: v1(22.475,50.05) 23.006,49.519 23.006,49.069 23.46,48.615 U600.26
  Bottom Layer w0.254: v1(22.475,50.05) 23.094,49.431 23.094,48.656 24.275,47.475 24.275,35.665 J801.15
GPIO46: J800.16 U600.16 | length 27.8
  Top Layer w0.2: U600.16 10.8,47.57 v1(10.8,48.85)
  Bottom Layer w0.254: J800.16 1.709,26.334 1.709,27.259 3.825,29.375 3.825,32.55 8.75,37.475 8.75,46.075 10.8,48.125 v1(10.8,48.85)
GPIO47: J801.17 U600.24 | length 30.9
  Top Layer w0.2: U600.24 20.92,48.662 21.075,48.817 v1(21.075,48.925)
  Bottom Layer w0.254: v1(21.075,48.925) 21.078,48.922 21.078,48.472 22.775,46.775 22.775,33.025 31.2,24.6 J801.17
GPIO48: J801.16 U600.25 | length 27.8
  Top Layer w0.2: U600.25 22.19,48.657 22.325,48.792 v1(22.325,48.9)
  Bottom Layer w0.254: v1(22.325,48.9) 22.325,48.1 23.45,46.975 23.45,34.9 31.2,27.15 J801.16
NetC401_2: C401.2 R400.2 R401.2 U400.8 | length 5.3
  Top Layer w0.254: R400.2 21.382,25.903 R401.2@22.248,25.903 ; R401.2 22.25,25.905 R401.2@22.248,25.903 ; U400.8 22.975,22.455 22.8,22.63 C401.2 22.695,23.465 22.003,24.157 22.003,25.385 22.167,25.549 22.167,25.822 R401.2@22.248,25.903
NetD300_1: D300.1 R300.2 | length 1.9
  Top Layer w0.2: D300.1 15.9,1.85 R300.2
NetLED700_4: R700.2 RGB.4 | length 1.7
  Top Layer w0.2: RGB.4 19.988,44.6 R700.2
NetQ500_B: Q500.B R501.2 | length 10.4
  Top Layer w0.254: R501.2 24.64,13.525 25.54,12.625 28.525,12.625 29.5,13.6 29.5,15.575 29,16.075 Q500.B
NetQ501_B: Q501.B R503.2 | length 2.1
  Top Layer w0.254: Q501.B 22.675,15.98 23.842,14.813 23.842,14.558 23.925,14.475 R503.2
NetR402_1: R402.1 U400.9 | length 2.4
  Top Layer w0.254: U400.9 23.475,22.843 23.889,23.256 23.889,23.439 24.475,24.025 R402.1
RTS: Q500.E R503.1 U400.24 | length 4
  Top Layer w0.2: U400.24 25.002,17.424 25.002,16.89 25.592,16.3 25.795,16.3 25.925,16.17 Q500.E
  Top Layer w0.254: R503.1 24.625,14.475 25.822,15.672 25.822,15.972 Q500.E
RXD: R403.1 U400.26 | length 31.5
  Top Layer w0.254: v1(17.15,37.5) 17.163,37.513 17.163,38.363 R403.1
  Bottom Layer w0.254: v1(17.15,37.5) 17.15,15.875 18.581,14.444 23.344,14.444 24.55,15.65 v1(24.55,16.175)
TXD: R404.1 U400.27 | length 29.8
  Top Layer w0.254: v1(16.1,39.2) 16.125,39.225 17.11,39.225 R404.1
  Bottom Layer w0.254: v1(16.1,39.2) 16.166,39.134 17.166,39.134 18.069,38.231 18.069,18.081 19.95,16.2 v1(23.55,16.2)
U0RXD: J801.5 R404.2 U600.36 | length 38.9
  Top Layer w0.254: R404.2 22.925,39.25 26.85,43.175 26.85,58.933 26.11,59.673 26.104,59.673 25.568,60.21 U600.36
  Bottom Layer w0.254: v1(23.85,60.25) 25.925,60.25 31.108,55.067 31.108,54.232 J801.5
U0TXD: J801.4 R403.2 U600.37 | length 42
  Top Layer w0.2: R403.2 23.15,38.375 27.623,42.848 27.623,59.425 25.568,61.48 U600.37
  Bottom Layer w0.254: v1(23.825,61.525) 24.425,62.125 26.825,62.125 30.259,58.691 ccw(c31.2,59.22) 30.671,58.279 31.2,57.75 J801.4
USB_UART_N: D206.1 U400.5 UART.2 | length 24.9
  Top Layer w0.11: U400.5 22.079,20.203 21.609,20.203 21.549,20.144 20.298,20.144 18.063,17.909 18.063,12.277 20.627,9.713 25.119,9.713 26.198,8.634 26.198,8.231 25.83,7.863 25.808,7.863 D206.1@25.62,7.675 ; UART.2 25.045,5.645 25.045,6.231 25.106,6.292 25.106,6.482 25.492,6.868 25.961,6.868 26.026,6.933 26.026,7.271 26.019,7.279 26.019,7.61 25.954,7.675 D206.1@25.62,7.675 ; D206.1 D206.1@25.62,7.675
USB_UART_P: D207.1 U400.4 UART.3 | length 24.4
  Top Layer w0.11: U400.4 22.079,19.847 21.609,19.847 21.549,19.906 20.396,19.906 18.3,17.81 18.3,12.375 20.725,9.95 25.217,9.95 26.435,8.732 26.435,7.895 D207.1@26.655,7.675 ; UART.3 25.405,5.645 25.405,6.231 25.344,6.292 25.344,6.384 25.59,6.63 26.06,6.63 26.263,6.834 26.263,7.37 26.256,7.377 26.256,7.61 26.321,7.675 D207.1@26.655,7.675 ; D207.1 D207.1@26.655,7.675
VBBUS: D200.1 D201.1 USB.1 | length 3.2
  Top Layer w0.2: D201.1 3.925,7.04 3.985,7.1 D200.1 5.21,6.99 5.21,6.765 5.975,6 USB.1
VBUS: D204.1 D205.1 R400.1 UART.1 | length 27.1
  Top Layer w0.2: R400.1 20.69,25.9 17.275,22.485 17.275,9.125 19.425,6.975 D205.1 22.15,6.99 22.21,7.05 D204.1 23.435,6.94 23.435,6.79 24.25,5.975 UART.1
VCC_3V3: C302.2 C303.2 C400.2 C600.2 C601.2 R300.1 R301.2 R302.2 R402.2 R500.2 R502.2 R600.1 U300.2 U400.6 U400.7 | length 22.9
  Top Layer w0.254: v1(3.425,65.425) 3.491,65.359 3.491,65.264 4.25,64.505 C600.2 4.52,64.525 R600.1 ; C601.2 4.025,60.055 v1(4.025,59.1) ; R301.2 3.92,30.5 4.003,30.417 4.003,30.195 5.798,28.4 v1(7.425,28.4) ; U300.2 8.3,17.785 C302.2 9.595,17.61 C303.2 9.805,17.4 v1(11.1,17.4) ; R300.1 17.56,2.565 18.34,2.565 v1(18.375,2.6) ; v1(19.375,22.225) 19.469,22.225 19.644,22.4 C400.2 20.95,22.4 21.308,22.042 21.308,21.762 21.795,21.275 U400.7 U400.6 ; v1(19.825,15.125) 19.84,15.14 20.71,15.14 R502.2 ; R302.2 24.97,29.674 25.175,29.469 v1(25.175,29.375) ; R402.2 25.725,24.025 26.575,23.175 v1(26.575,23.1) ; R500.2 27.935,15.29 28.765,15.29 v1(28.775,15.3)
VCC_5V: C300.2 C301.2 D200.2 D204.2 J800.21 RGB.1 U300.1 | length 71.1
  Top Layer w0.254: J800.21 1.55,13.425 5.075,9.9 v1(5.075,9.85) 5.088,9.837 5.088,8.612 D200.2 ; U300.1 6,19.069 5.683,18.751 4.745,18.751 4.644,18.65 v1(4.55,18.65) 4.55,18.641 4.85,18.341 C300.2 4.975,17.6 C301.2 ; v1(13.575,44.65) 13.575,40.463 16.2,37.838 16.2,31.425 v1(14.05,29.275) ; v1(22.225,9.025) 22.281,8.969 22.906,8.969 23.132,8.743 23.242,8.743 23.325,8.66 D204.2
  Bottom Layer w0.254: v1(14.05,29.275) 14.05,28.15 v1(4.55,18.65) 4.55,10.375 v1(5.075,9.85) 21.4,9.85 v1(22.225,9.025)
pads on no net: RGB.2 U400.1 U400.2 U400.10 U400.12 U400.13 U400.14 U400.15 U400.16 U400.17 U400.18 U400.19 U400.20 U400.21 U400.22 U400.23 U400.25 UART.4 USB.4

## Polygon pours and split planes (outlines as drawn)
VCC_3V3 on Power "VCC_3V3_L02_P000" (solid, pour order 0): 32.707,0 32.707,66 0,66 0,0
GND on Ground "GND_L03_P001" (solid, pour order 1): 32.707,0 32.707,66 0,66 0,0

## Text inside footprints (layer, text, board x,y; h text height)
RGB: Top Overlay "*" at 14.39,45.22 h1.27; Mechanical 13 "*" at 15.152,44.42 h1.27
U400: Top Overlay "*" at 20.716,18.66 h1.27 r180; Mechanical 13 "*" at 22.316,18.66 h1.27 r180
U600: Top Overlay "*" at 6.023,64.655 h1.27; Mechanical 13 "*" at 8.792,64.655 h1.27
UART: Mechanical 13 "PCB END" at 30.4,1.625 h0.41
USB: Mechanical 13 "PCB END" at 12.125,1.65 h0.41